# Altium PCB argus_I.PcbDoc
Units mil, origin at the board's own origin, x right, y up, seen from the top; angles counter-clockwise.
Board outline 2215 x 1430 mil, 4 copper layers (Top Layer, L2_GND, L3_PWR, Bottom Layer), stack 23.756 mil thick; 24 components, 19 nets, 116 pads, 0 vias.
Unrouted connection lines stored in the file: 51.
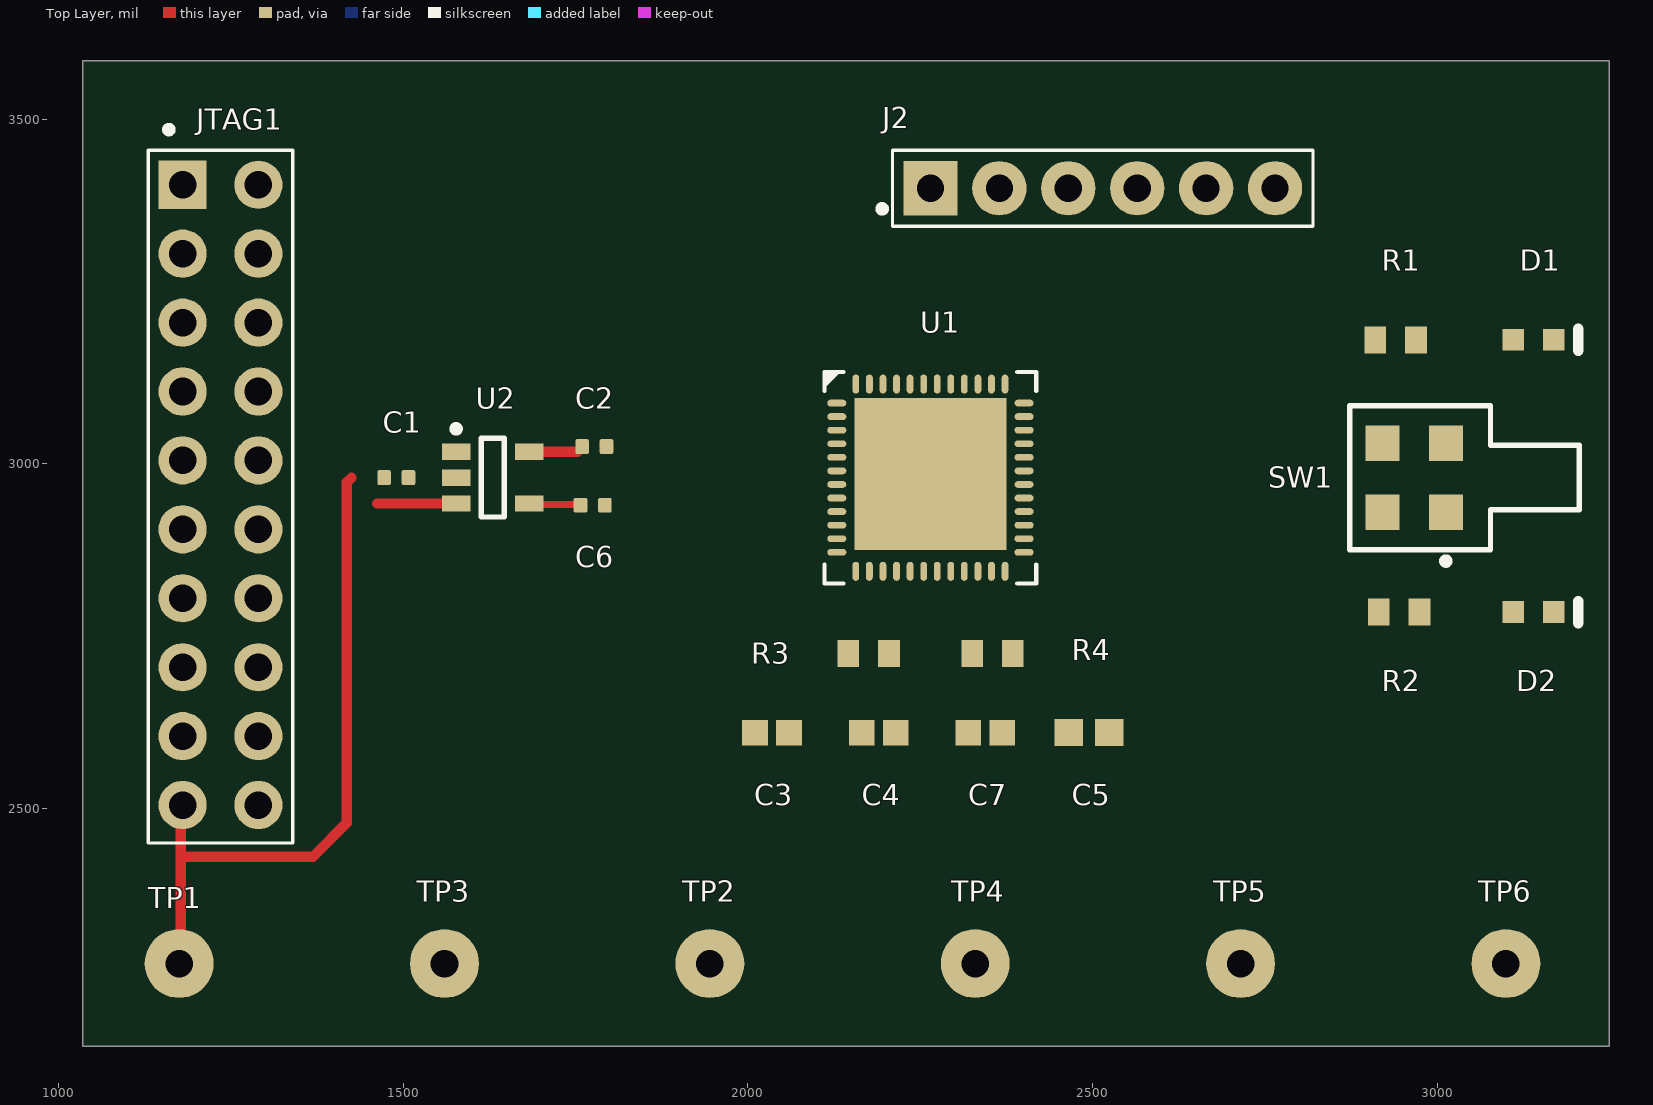
[diagram p0: Top Layer view]
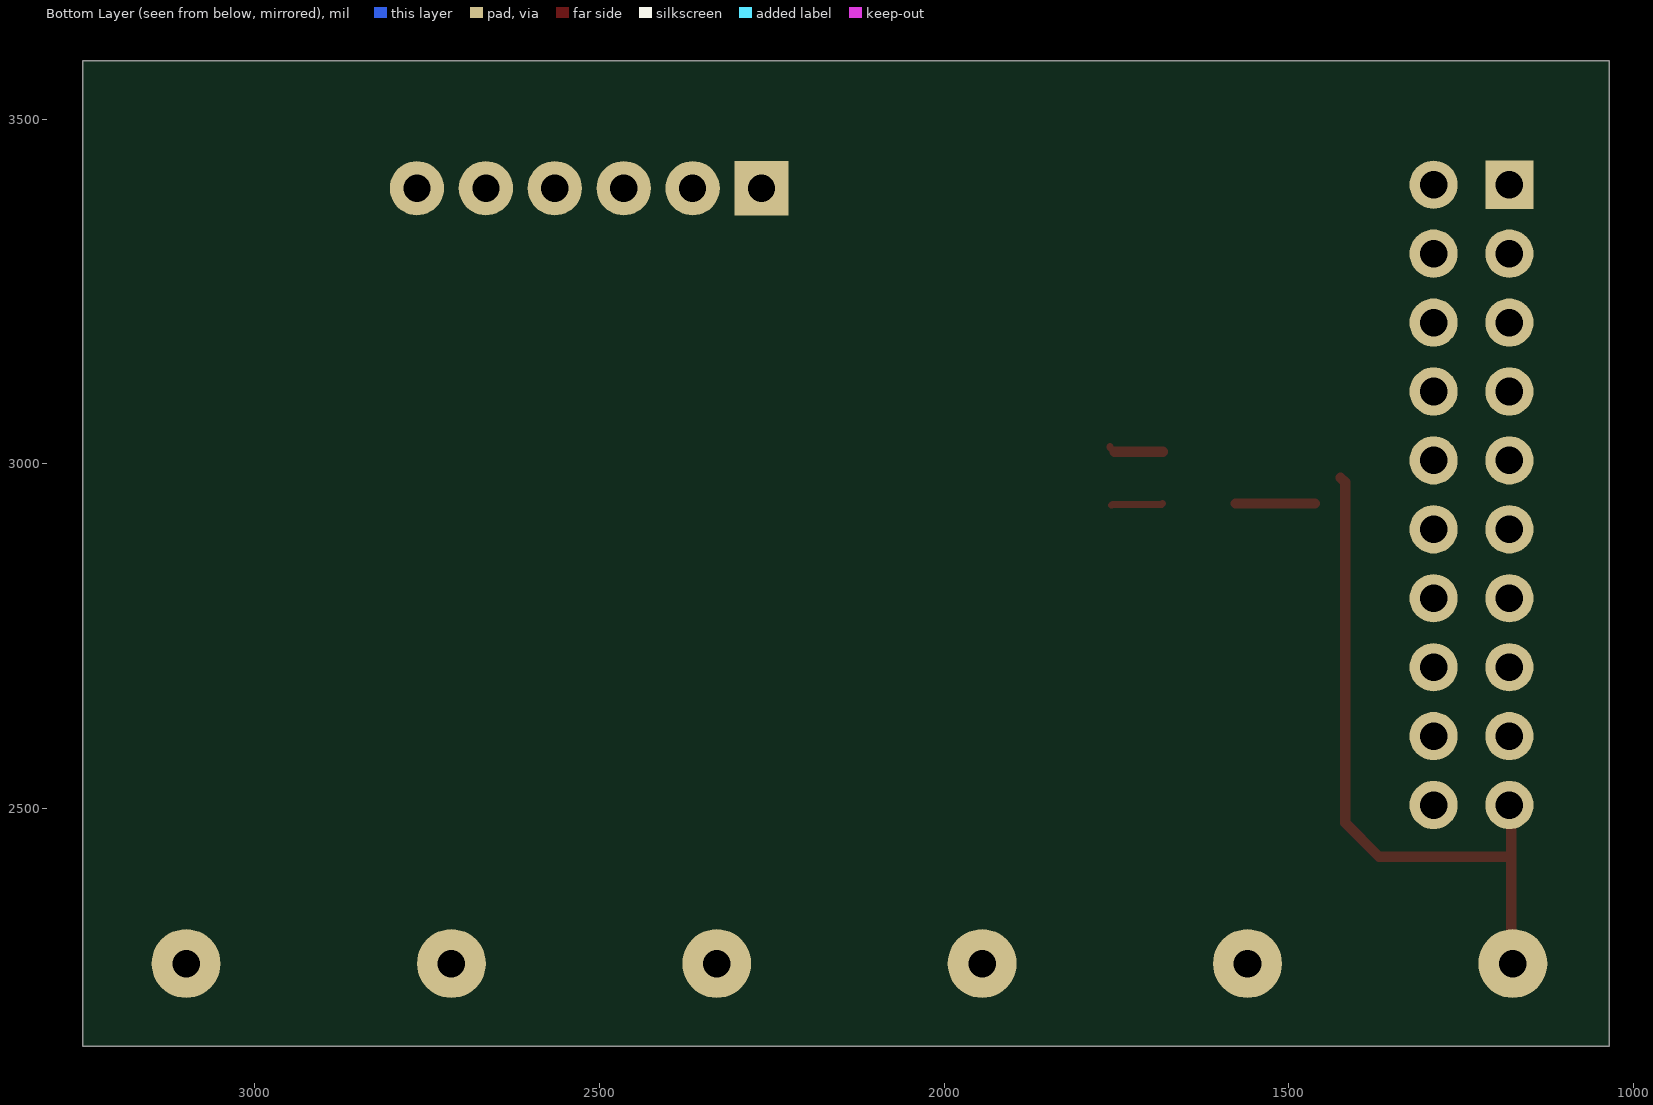
[diagram p1: Bottom Layer view, seen from below]
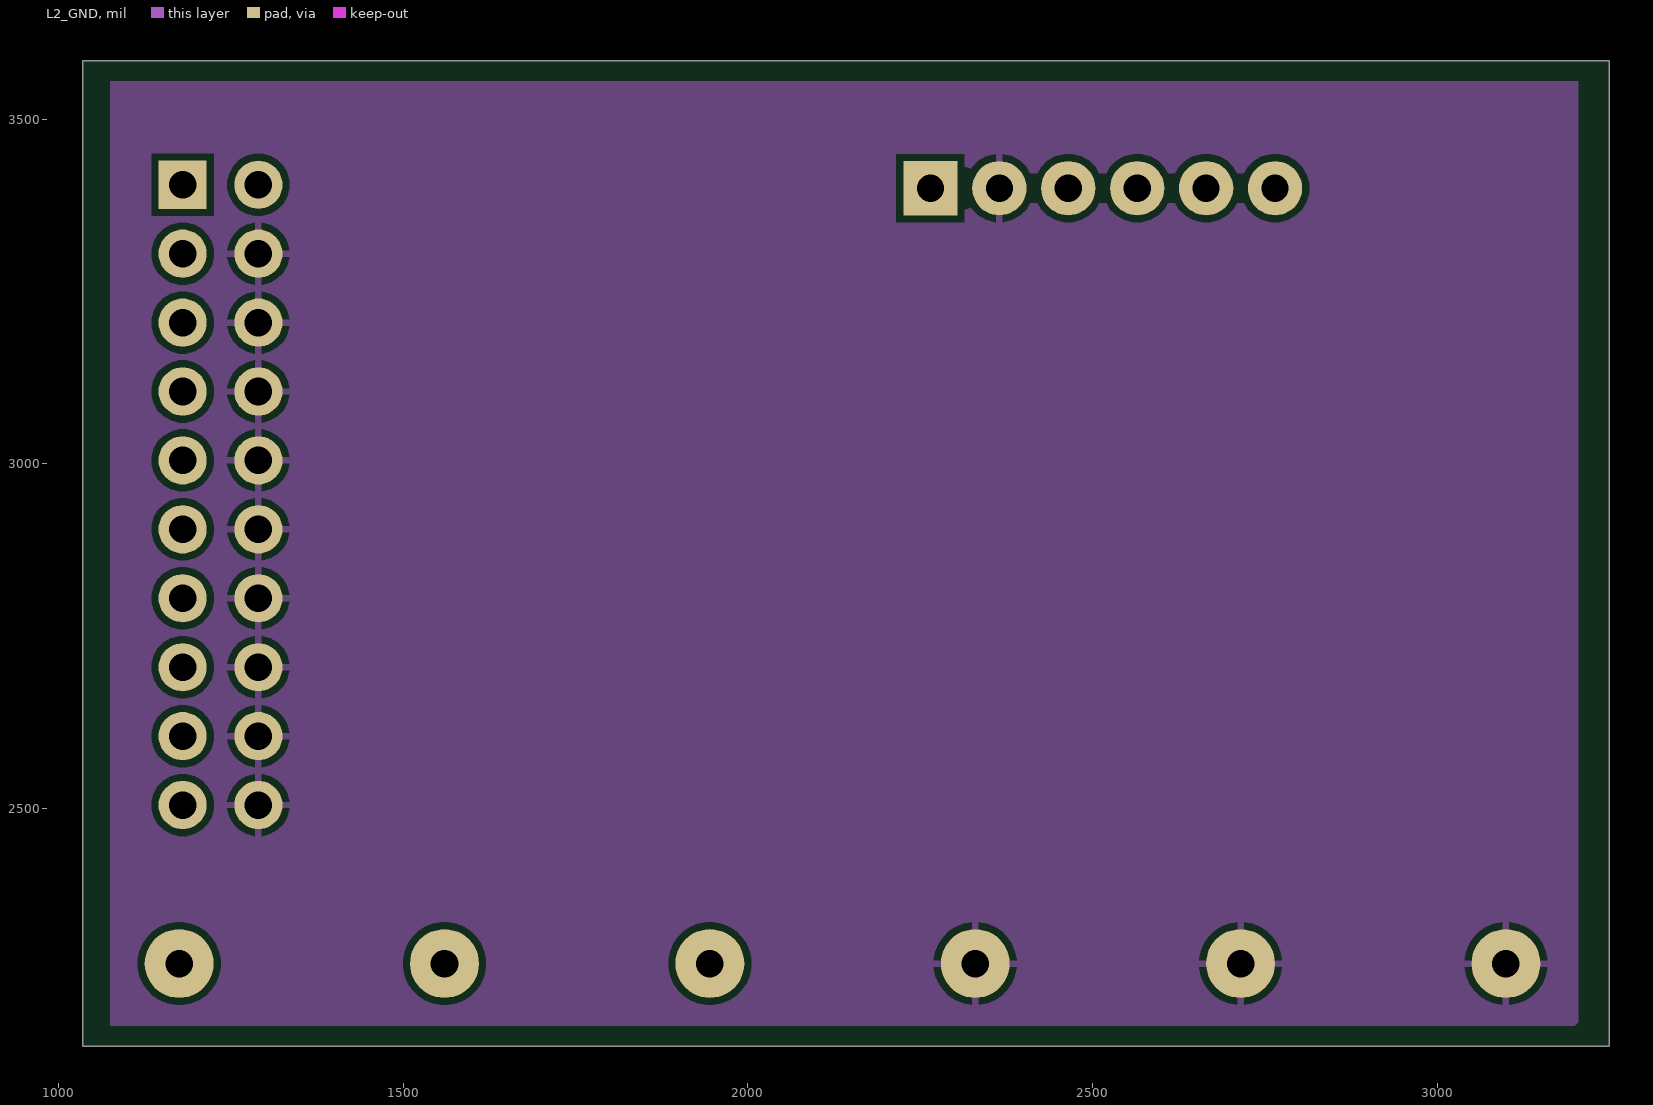
[diagram p2: L2_GND]
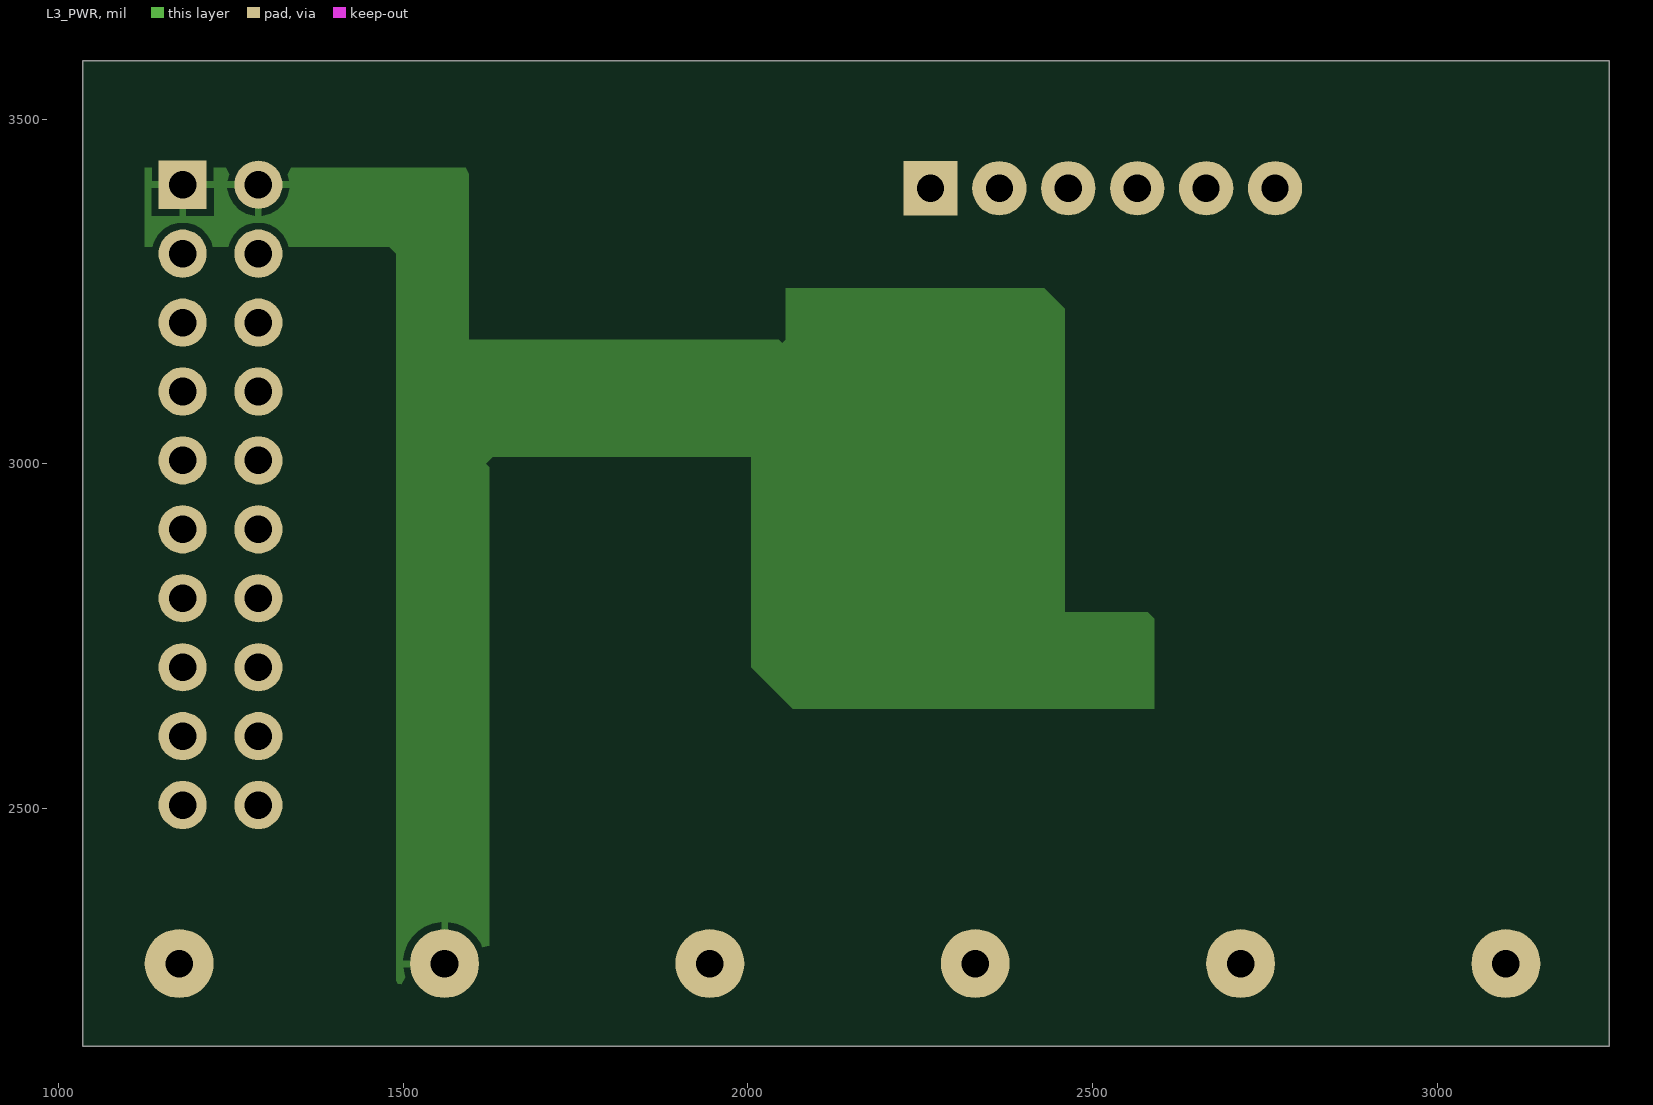
[diagram p3: L3_PWR]

## Layer stack, top to bottom
Top Solder: solder mask 0.4, Solder Resist, Dk 3.5
Top Layer: signal copper 1.4
Dielectric 2: prepreg 2.8, PP-006, Dk 4.1
L2_GND: signal copper 1.378
Dielectric 1: dielectric 12.6, FR-4, Dk 4.8
L3_PWR: signal copper 1.378
Dielectric 3: prepreg 2.8, PP-006, Dk 4.1
Bottom Layer: signal copper 1.4
Bottom Solder: solder mask 0.4, Solder Resist, Dk 3.5

## Board outline
1035,2155 1035,3585 3250,3585 3250,2155

## Design rules (kind name [scope] priority, off if disabled: settings)
Clearance Clearance_U1_FinePitch [InComponent('U1') vs InComponent('U1')] p1: gap=6 ignorepadtopadclearanceinfootprint=FALSE
Clearance [All] p2: gap=10 ignorepadtopadclearanceinfootprint=FALSE
MinimumSolderMaskSliver MaskSliver_U1_FinePitch [InComponent('U1') vs InComponent('U1')] p1: minsoldermaskwidth=5
MinimumSolderMaskSliver MaskSliver_U2_Regulator [InComponent('U2') vs InComponent('U2')] p2: minsoldermaskwidth=5
MinimumSolderMaskSliver [All] p3: minsoldermaskwidth=10
PolygonConnect [All] p1: connectstyle=Relief reliefconductorwidth=10 reliefentries=4 polygonreliefangle="90 Angle" airgapwidth=10
RoutingVias [All] p1: holewidth=28 width=50 viastyle="Through Hole" minholewidth=28 minwidth=50 maxholewidth=28 maxwidth=50
SolderMaskExpansion [All] p1: expansion=0 istentingtop=FALSE
SupplyNets "Schematic Supply Nets" [InNet('GND')] p1: voltage=0.000
Width Width_5V_IN_Power [InNet('5V_IN')] p1: maxlimit=20 minlimit=10 preferedwidth=15
Width Width_3V3_Power [All] p2: maxlimit=20 minlimit=10 preferedwidth=15
Width [All] p3: maxlimit=10 minlimit=10 preferedwidth=10
29 further rules are at their usual default settings.

## Components (designator, comment, footprint, x,y, rotation, side; value= is the part's Value field where it differs from the comment)
C1 "2.2µF" CAPC0402_1005_NO_SILK 1490,2980 r180 top
C2 "2.2µF" CAPC0402_1005_NO_SILK 1777.28,3025 r0 top
C3 "Capacitor 100 nF +/-10% 50 V 0603" CAPC1608X90X40NL10T20 2035,2610 r0 top value=100nF
C4 "Capacitor 100 nF +/-10% 50 V 0603" CAPC1608X90X40NL10T20 2190,2610 r0 top value=100nF
C5 "Capacitor 1 uF +/- 10% 16 V 0603" CAPC1608X94X35NL15T15 2495,2610 r0 top value=1µF
C6 "10nF" CAPC0402_1005_NO_SILK 1775,2940 r0 top
C7 "Capacitor 100 nF +/-10% 50 V 0603" CAPC1608X90X40NL10T20 2344.61,2610 r0 top value=100nF
D1 "19-217/R6C-AL1M2VY/3T" EVRL-0603-2_V 3140,3180 r0 top
D2 "19-217-G7C-AN1P2-3T" EVRL-0603-2_V 3140,2785 r0 top
J2 "SPI_BREAKOUT" HDR_1X06_2P54_TH 2265,3400 r90 top
JTAG1 "JTAG_20_ARM" JTAG_20_ARM_2X10_2P54_TH 1180,3405 r0 top
R1 "Resistor 1k +/-1% 0603 100 mW" RESC1608X55X25ML10T15 2940,3180 r0 top value=1k
R2 "Resistor 1k +/-1% 0603 100 mW" RESC1608X55X25ML10T15 2945,2785 r0 top value=1k
R3 "Resistor 10k +/-1% 0603 100 mW" RESC1608X55X25ML10T15 2175.47,2725 r0 top value=10k
R4 "Resistor 10k +/-1% 0603 100 mW" RESC1608X55X25ML10T15 2355,2725 r0 top value=10k
SW1 "7914S-1-050E" FP-7914S-1-050E-MFG 3040,2980 r90 top
TP1 "TESTPAD" TESTPAD_1_TH#1 1210,2325 r0 top
TP2 "TESTPAD" TESTPAD_1_TH#2 1920,2330 r0 top
TP3 "TESTPAD" TESTPAD_1_TH#3 1550,2315 r0 top
TP4 "TESTPAD" TESTPAD_1_TH#4 2245,2315 r0 top
TP5 "TESTPAD" TESTPAD_1_TH#5 2705,2300 r0 top
TP6 "TESTPAD" TESTPAD_1_TH#6 3125,2275 r0 top
U1 "STM32L452CEU6" STM-UFQFPN48_N 2265,2980 r0 top
U2 "LP2985-33DBVR" TI-DBV5_V 1630,2980 r0 top

## Footprints (in the part's own frame and the unit in brackets; to place one, negate y for a bottom-side part, rotate by r counter-clockwise, add the part's x,y. Pads: shape width x height; smd on the part's side, far side on the other; paste and mask are expansions set on the pad)
CAPC0402_1005_NO_SILK [mm]
  rrect25% 0.5x0.55 smd: 1(-0.45,0) 2(0.45,0)
  body extent -0.5,-0.25 0.5,0.25, height 0.6
CAPC1608X90X40NL10T20 [mm] "Chip Capacitor, 2-Leads, Body 1.70x0.90mm, IPC Medium Density"
  rect 0.95x0.95 smd: 1(-0.625,0) 2(0.625,0)
  body extent -0.85,-0.45 0.85,0.45, height 0.9
CAPC1608X94X35NL15T15 [mm] "Chip Capacitor, 2-Leads, Body 1.75x0.96mm, IPC Medium Density"
  rect 1.05x1 smd: 1(-0.75,0) 2(0.75,0)
  body extent -0.87,-0.48 0.87,0.48, height 0.94
EVRL-0603-2_V [mm] "SMD, 2-Leads, Body 1.6x0.8mm"
  rect 0.8x0.8 smd: 1(-0.75,0) 2(0.75,0)
  silkscreen extent 1.65,-0.4 1.65,0.4, body extent -0.8,-0.4 0.8,0.4, height 0.5
FP-7914S-1-050E-MFG [mm]
  rect 1.3x1.25 smd paste+0 mask+0: 1_1-(-1.27,0.69) 1_2+(1.27,0.69) 2_1-(-1.27,3.02) 2_2+(1.27,3.02)
  silkscreen extent -3.2,-4.23 2.65,4.23, body extent -2.75,-4.33 2.75,4.33, height 0.25
HDR_1X06_2P54_TH [mm]
  rect 2x2 hole 1: 1(0,0)
  round 2 hole 1: 2(0,-2.54) 3(0,-5.08) 4(0,-7.62) 5(0,-10.16) 6(0,-12.7)
  silkscreen extent -1.4,-14.1 1.4,1.9
JTAG_20_ARM_2X10_2P54_TH [mil]
  rect 70x70 hole 40: 1(0,0)
  round 70 hole 40: 2(110,0) 3(0,-100) 4(110,-100) 5(0,-200) 6(110,-200) 7(0,-300) 8(110,-300) 9(0,-400) 10(110,-400) 11(0,-500) 12(110,-500) 13(0,-600) 14(110,-600) 15(0,-700) 16(110,-700) 17(0,-800) 18(110,-800) 19(0,-900) 20(110,-900)
  silkscreen extent -50,-955 160,85
RESC1608X55X25ML10T15 [mm] "Chip Resistor, 2-Leads, Body 1.70x0.90mm, IPC Low Density"
  rect 0.8x1 smd: 1(-0.75,0) 2(0.75,0)
  body extent -0.85,-0.45 0.85,0.45, height 0.55
STM-UFQFPN48_N [mm]
  oval 0.7x0.25 smd: 1(-3.45,2.75) 2(-3.45,2.25) 3(-3.45,1.75) 4(-3.45,1.25) 5(-3.45,0.75) 6(-3.45,0.25) 7(-3.45,-0.25) 8(-3.45,-0.75) 9(-3.45,-1.25) 10(-3.45,-1.75) 11(-3.45,-2.25) 12(-3.45,-2.75) 25(3.45,-2.75) 26(3.45,-2.25) 27(3.45,-1.75) 28(3.45,-1.25) 29(3.45,-0.75) 30(3.45,-0.25) 31(3.45,0.25) 32(3.45,0.75) 33(3.45,1.25) 34(3.45,1.75) 35(3.45,2.25) 36(3.45,2.75)
  oval 0.25x0.7 smd: 13(-2.75,-3.45) 14(-2.25,-3.45) 15(-1.75,-3.45) 16(-1.25,-3.45) 17(-0.75,-3.45) 18(-0.25,-3.45) 19(0.25,-3.45) 20(0.75,-3.45) 21(1.25,-3.45) 22(1.75,-3.45) 23(2.25,-3.45) 24(2.75,-3.45) 37(2.75,3.45) 38(2.25,3.45) 39(1.75,3.45) 40(1.25,3.45) 41(0.75,3.45) 42(0.25,3.45) 43(-0.25,3.45) 44(-0.75,3.45) 45(-1.25,3.45) 46(-1.75,3.45) 47(-2.25,3.45) 48(-2.75,3.45)
  rect 5.6x5.6 smd paste-3: 49(0,0.127)
  silkscreen extent -3.9,-3.9 3.9,3.9, body extent -3.5,-3.5 3.5,3.5, height 0.55
TESTPAD_1_TH#1 [mil]
  round 100 hole 40: 1(-35,-50)
TESTPAD_1_TH#2 [mil]
  round 100 hole 40: 1(25,-55)
TESTPAD_1_TH#3 [mil]
  round 100 hole 40: 1(10,-40)
TESTPAD_1_TH#4 [mil]
  round 100 hole 40: 1(85,-40)
TESTPAD_1_TH#5 [mil]
  round 100 hole 40: 1(10,-25)
TESTPAD_1_TH#6 [mil]
  round 100 hole 40: 1(-25,0)
TI-DBV5_V [mm] "SOT23, 5-Leads, Body 3.05x1.75mm, Pitch 0.95mm"
  rect 1.05x0.6 smd paste-0.025 mask+0.07: 1(-1.35,0.95) 2(-1.35,0) 3(-1.35,-0.95) 4(1.35,-0.95) 5(1.35,0.95)
  silkscreen extent -1.47,-1.45 0.43,1.92, body extent -1.5,-1.53 1.5,1.53, height 1.45

## Part data
C1 C2 C6: library part CAP_0402_NO_SILK
C3 C4 C7: library part CMP-001-00017-6, "Chip Capacitor, 100 nF, +/- 10%, 50 V, 0603 (1608 Metric)", Capacitor Type=Ceramic, Case/Package=0603, Max Operating Temperature=125°C, Min Operating Temperature=-55°C, Tolerance=10%, Voltage Rating=50V, Mounting Technology=SM, Pins=2, RoHS Compliant=True
C5: library part CMP-001-00003-6, "Chip Capacitor, 1 uF, +/- 10%, 16 V, 0603 (1608 Metric)", Capacitor Type=Ceramic, Case/Package=0603, Max Operating Temperature=125°C, Min Operating Temperature=-55°C, Tolerance=10%, Voltage Rating=16V, Mounting Technology=SM, Pins=2, RoHS Compliant=True
D1: library part CMP-007-00004-2, "Chip LED, Red, 5 V, 25 mA, -40 to 85 degC, 2-Pin SMD (0603), RoHS, Tape and Reel", Case/Package=0603, Colour=Red, Forward Voltage=2.2V, Manufacturer="Everlight Electronics", Package Description="2-Pin Surface Mount Device, Body 1.6 x 0.8 mm", Datasheet URL=https://datasheet.ciiva.com/4688/el-19-217-r6c-al1m2vy-3tpdf-187026-4688713.pdf, Datasheet Version="Rev. 1, 01/2005", Lens Style=Clear, Manufacturer URL=http://www.everlight.com/, Mounting Technology=SM, Package Reference=0603, RoHS Compliant=False
D2: library part CMP-007-00002-2, "Chip LED, Yellow-Green, 5 V, 25 mA, -40 to 85 degC, 2-Pin SMD (0603), RoHS, Tape and Reel", Case/Package=0603, Colour=Green, Forward Voltage=2V, Manufacturer="Everlight Electronics", Package Description="2-Pin Surface Mount Device, Body 1.6 x 0.8 mm", Datasheet URL=https://datasheet.ciiva.com/48679/19-217-g7c-an1p2-3t-48679179.pdf, Datasheet Version="Rev. 1, 04/2006", Lens Style=Clear, Manufacturer URL=http://www.everlight.com/, Mounting Technology=SM, Package Reference=0603, Pins=2, RoHS Compliant=True, Viewing Angle=120degrees
J2: library part HDR_1X6_2P54_TH
R1 R2: library part CMP-009-00014-5, "Chip Resistor, 1 KOhm, +/-1%, 0.1 W, -55 to 155 degC, 0603 (1608 Metric)", Case/Package=0603, Max Operating Temperature=155°C, Min Operating Temperature=-55°C, Power=100mW, Tolerance=1%, Voltage Rating=50V, Mounting Technology=SM, Pins=2, RoHS Compliant=True
R3 R4: library part CMP-009-00017-5, "Chip Resistor, 10 KOhm, +/- 1%, 01 W, -55 to 155 degC, 0603 (1608 Metric)", Case/Package=0603, Max Operating Temperature=155°C, Min Operating Temperature=-55°C, Power=100mW, Tolerance=1%, Voltage Rating=50V, Mounting Technology=SM, Pins=2, RoHS Compliant=True
SW1: library part CMP-07427-000003-1, "SWITCH TACTILE SPST-NO 0.1A 24V", Case/Package=SMD/SMT, Current Rating=100mA, Max Operating Temperature=125°C, Min Operating Temperature=-55°C, Operating Force=300gf, Package Quantity=1, Voltage Rating (DC)=16V, Actuator Material=Rubber, Actuator Type=Standard, Contact Material=Gold, Contact Plating=Silver, Depth=7.85mm, Illumination Type=Non-Illuminated, Length=5mm, Max Current Rating=100mA, Mechanical Life=100000Cycles, Mount="Surface Mount", Orientation="Right Angle", Packaging="Tape and Reel", RoHS Compliant=Yes, Series=7914, Switch Function=Off-Mom, Termination=SMD/SMT, Throw Configuration=SPST
U1: library part CMP-020-00022-3, "ARM® Cortex®-M4 STM32L4 Microcontroller IC 32-Bit 80MHz 512KB (512K x 8) FLASH 48-UFQFPN (7x7)", Case/Package=UFQFN-48, Min Supply Voltage=2V, ComponentLink1Description="Manufacturer URL", ComponentLink1URL=http://www.st.com/, ComponentLink2Description=Datasheet, ComponentLink2URL=http://www.st.com/st-web-ui/static/active/en/resource/technical/document/datasheet/CD00161566.pdf, I/Os=38, Mounting Technology="Surface Mount", Pins=49, RAM Size=160, RoHS Compliant=Yes
U2: library part CMP-019-00026-3, "Single Output Low Noise LDO, 150 mA, Fixed 3.3 V Output, 1.5% Tolerance, 2.2 to 16 V Input, Low IQ, 5-Pin SOT-23 (DBV), -40 to 125 degC, Green (RoHS & no Sb/Br), Tape and Reel", Case/Package=SOT-23-5, Dropout Voltage=3mV, Manufacturer="Texas Instruments", Max Input Voltage=16V, Max Operating Temperature=125°C, Max Ouput Current=150mA, Min Input Voltage=2.2V, Min Operating Temperature=-40°C, Nominal Output Voltage=3.3V, Package Description="5-Pin Small Outline Transistor, Body 2.9 x 1.6 mm, Pitch 0.95 mm", Package Quantity=3000, Package Reference=DBV5, Package Version="4073253-4/N, 12/2014", Datasheet URL=http://www.ti.com/lit/ds/symlink/lp2985.pdf, Datasheet Version="SLVS522O, 01/2015", Manufacturer URL=http://www.ti.com/, Mounting Technology=SM, Output Current=150mA, Output Voltage=3.3V, Outputs=1, Package URL=http://www.ti.com/lit/ml/mpds018l/mpds018l.pdf, Packaging=TapeandReel, Pins=16, RoHS Compliant=True

## Nets (pads, with @x,y where several pads share a name; then routed paths per layer and width w, separated by ;. In a path a pad name is that pad's centre, name@x,y a point inside that pad or via, vN(x,y) a via of type N, cw(c..) or ccw(c..) an arc to the next point about the centre after c; other vN are vias at no path point)
3V3: C2.1 C3.1 C4.1 C5.1 C7.1 J2.1 JTAG1.1 JTAG1.2 R1.1 R4.2 TP3.1 U1.1 U1.9 U1.24 U1.36 U1.48 U2.5 | length 80.1
  Top Layer w10: C2.1@1752.95,3017.4 1759.57,3024.02 C2.1
  Top Layer w15: U2.5 C2.1@1752.95,3017.4
5V_IN: C1.1 JTAG1.19 TP1.1 U2.1 U2.3 | length 1111.2
  Top Layer w10: TP1.1 TP1.1@1177.5,2277.5 ; JTAG1.19@1177.5,2502.5 JTAG1.19 ; 1180,2435.86 1185.86,2430
  Top Layer w15: TP1.1@1177.5,2277.5 JTAG1.19@1177.5,2502.5 ; 1185.86,2430 1369.14,2430 1418.29,2479.15 1418.29,2925.02 1418.29,2973.29 1425,2980 ; 1462.4,2942.6 1504.68,2942.6 U2.3
GND: C1.2 C2.2 C3.2 C4.2 C5.2 C6.2 C7.2 D1.2 D2.2 J2.2 JTAG1.4 JTAG1.6 JTAG1.8 JTAG1.10 JTAG1.12 JTAG1.14 JTAG1.16 JTAG1.18 JTAG1.20 R3.1 SW1.2_1- SW1.2_2+ TP4.1 TP5.1 TP6.1 U1.8 U1.23 U1.35 U1.47 U1.49 U2.2
JTAG_NTRST: JTAG1.3 U1.40
JTAG_TCK: JTAG1.9 U1.37
JTAG_TDI: JTAG1.5 U1.38
JTAG_TDO: JTAG1.13 U1.39
JTAG_TMS: JTAG1.7 U1.34
NetC6_1: C6.1 U2.4 | length 75.2
  Top Layer w10: U2.4 1684.45,2941.3 1755.98,2941.3 C6.1
NetD1_1: D1.1 R1.2
NetD2_1: D2.1 R2.2
NetR2_1: R2.1 U1.18
NetR3_2: R3.2 U1.44
NetR4_1: R4.1 U1.7
NRST: JTAG1.15 SW1.1_1- SW1.1_2+ TP2.1
SPI1_CS: J2.3 U1.14
SPI1_MISO: J2.5 U1.16
SPI1_MOSI: J2.6 U1.17
SPI1_SCK: J2.4 U1.15
pads on no net: JTAG1.11 JTAG1.17 U1.2 U1.3 U1.4 U1.5 U1.6 U1.10 U1.11 U1.12 U1.13 U1.19 U1.20 U1.21 U1.22 U1.25 U1.26 U1.27 U1.28 U1.29 U1.30 U1.31 U1.32 U1.33 U1.41 U1.42 U1.43 U1.45 U1.46

## Polygon pours and split planes (outlines as drawn)
3V3 on L3_PWR "3V3_L03_P002" (solid, pour order 2): 1125,3315 1480,3315 1490,3305 1490,2250 1485,2245 1490,2240 1625,2240 1625,2995 1620,3000 1630,3010 2005,3010 2005,2705 2065,2645 2590,2645 2590,2775 2580,2785 2460,2785 2460,3225 2430,3255 2055,3255 2055,3180 2050,3175 2045,3180 1595,3180 1595,3420 1600,3425 1595,3430 1125,3430
GND on L2_GND "GND_L02_P001" (solid, pour order 1): 1075,3555 3205,3555 3205,2190 3200,2185 1075,2185